# EAGLE board ATTiny10ProgrammingAdapter (EAGLE 6.4)
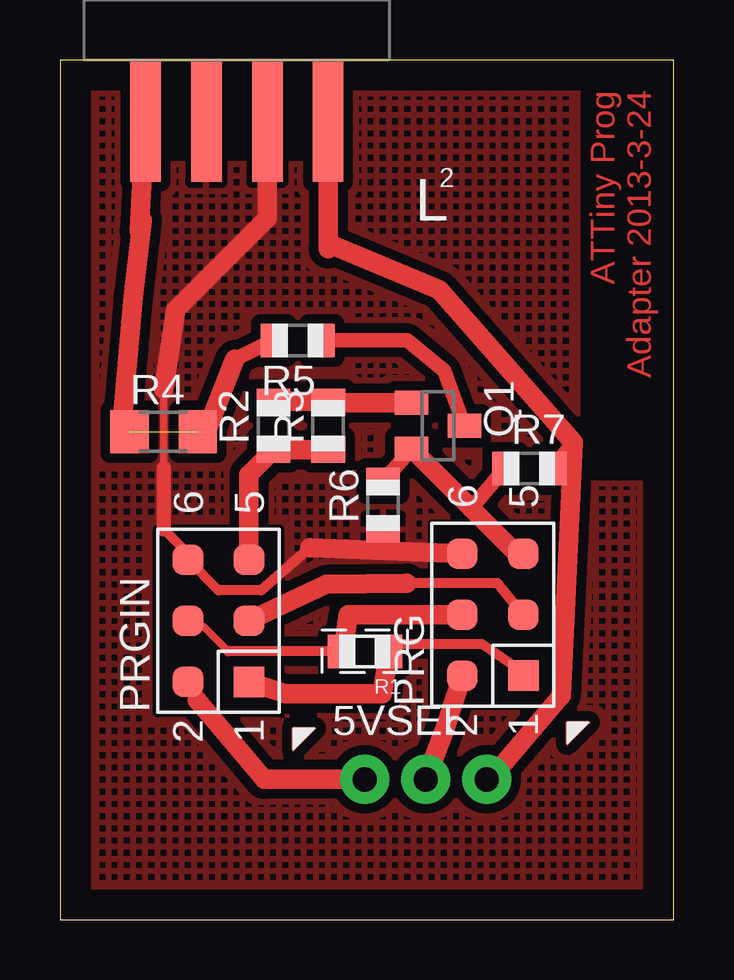
[diagram p0: board, top side]
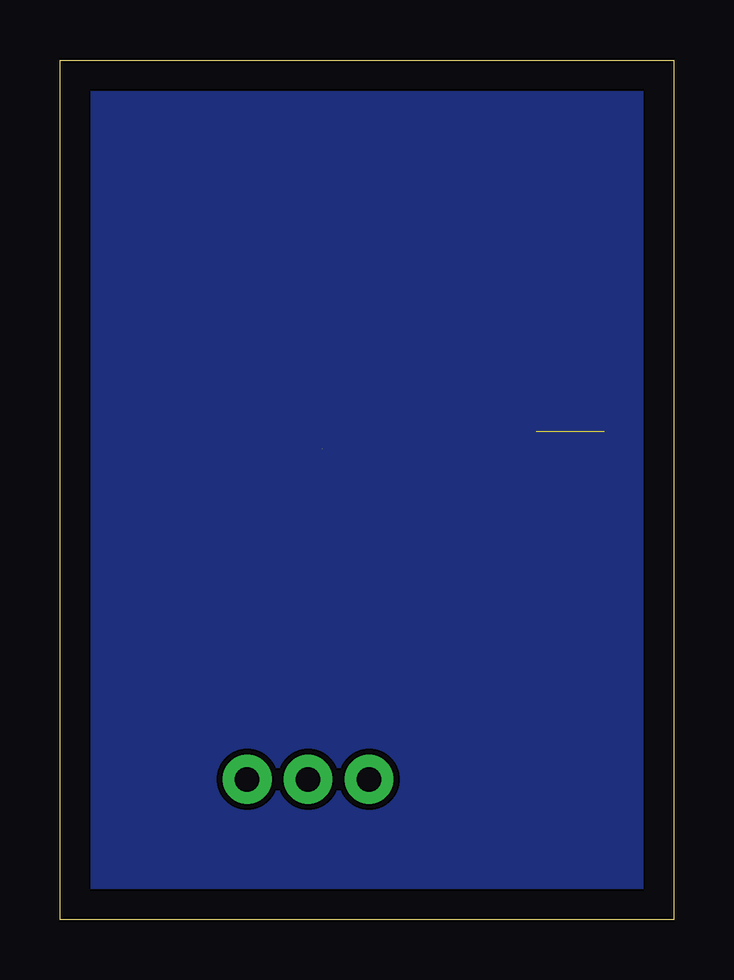
[diagram p1: board, bottom side, seen from below]

Size 25.58 x 35.8 mm. Coordinates in mm from the lower left corner, seen from the top.
Outline: 0,0 25.58,0 25.58,35.8 0,35.8 0,0
Copper layers (1*16): Top 0.0356mm / dielectric 1.5011mm / Bottom 0.0356mm
Design rules "ll-etch-lax": minimum track width 8mil, minimum drill 21mil, track to track 8mil, track to pad 7mil, pad to pad 12mil, via to via 20mil, smd to smd 4mil, copper to edge 50mil, drill to drill 30mil, minimum pad ring 20mil, minimum via ring 18mil, stop-mask expansion 0mil, vias tented up to drill 20mil, thermal gap 10mil

## Footprints (pad centres in the part's own frame; a part is rotated, then mirrored left to right if it is on the bottom)
1X03-CLEANBIG = drill 1.016 pad 1.676: 1 -2.54,0; 2 0,0; 3 2.54,0
1X04-SMD-LONG = smd 1.27 x 5.08: 1 -3.81,0; 2 -1.27,0; 3 1.27,0; 4 3.81,0
HEADER_PRG_2X03_ETCH = smd 1.27 x 1.27: 1 -2.54,-1.27; 2 -2.54,1.27; 3 0,-1.27; 4 0,1.27; 5 2.54,-1.27; 6 2.54,1.27
SOT23 = smd 1 x 1.4: 1 -0.95,-1.1; 2 0.95,-1.1; 3 0,1.1
R0805 = smd 1.1 x 1.4: 1 -1,0; 2 1,0
R1206 = smd 1.6 x 1.803: 1 -1.422,0; 2 1.422,0

## Placement (x,y rotation side)
5VSEL  [1X03-CLEANBIG]  15.24,5.84 0 top
EXTPOWER  [1X04-SMD-LONG]  7.37,33.27 180 top
PRG  CON_HEADER_PRG_AVR_ICSP_ETCH  [HEADER_PRG_2X03_ETCH]  18.03,12.7 90 top
PRGIN  CON_HEADER_PRG_AVR_ICSP_ETCH  [HEADER_PRG_2X03_ETCH]  6.6,12.45 90 top
Q1  [SOT23]  15.75,20.57 270 top
R1  1K  [R0805]  12.7,11.18 180 top
R2  BLANK  [R0805]  8.89,20.57 90 top
R3  1k  [R0805]  11.18,20.57 90 top
R4  0  [R1206]  4.32,20.32 0 top
R5  50k  [R0805]  9.91,24.13 180 top
R6  2k  [R0805]  13.46,17.27 90 top
R7  2k  [R0805]  19.56,18.8 0 top
U$1  [L2LOGO]  15.49,29.72 0 top

## Library data of the parts
5VSEL R2 R3 R5-R7 = adafruit
EXTPOWER PRG PRGIN R1 R4 U$1 = LL
Q1 = semicon-smd-ipc

## Nets
+5V: 5VSEL.2 PRG.2
+12V: EXTPOWER.4 R4.1 R4.2 R5.2
GND: EXTPOWER.2 EXTPOWER.3 PRG.6 PRGIN.6 R6.1
MOSI: PRG.4 PRGIN.4 R1.2
N$1: Q1.1 R2.2 R3.2
N$4: Q1.3 R5.1
PRGRST: PRGIN.5 R2.1 R3.1
RST: PRG.5 Q1.2 R6.2 R7.1
TPICLK: PRG.3 PRGIN.3
TPIDATA: PRG.1 PRGIN.1 R1.1
V+: 5VSEL.1 PRGIN.2
VDD: 5VSEL.3 EXTPOWER.1 R7.2

## Tracks (layer width: path | path; a pad name or v marks a point on that pad's centre or on a via)
+5V
  Top 0.813: PRG.2 16,7.87 5VSEL.2
+12V  (1 unrouted)
  Top 0.254: 2.54,20.07 2.79,20.32 | 3.43,29.13 3.3,28.7
  Top 0.406: 2.79,20.32 R4.1 | 6.1,20.32 R4.2
  Top 0.61: R5.2 7.29,23.34
  Top 0.813: EXTPOWER.4 3.3,28.7 | 3.43,29.13 3.05,25.96 2.54,20.07 | 6.1,20.32 7.29,23.34
GND
  Top 0.305: PRGIN.6 5.33,15.24 | 4.32,18.8 4.32,22.1
  Top 0.406: 10.41,15.49 8.38,13.72 6.6,13.72 PRGIN.6 | 5.33,15.24 4.32,16.26
  Top 0.61: 4.32,16.26 4.32,18.8
  Top 0.813: PRG.6 10.41,15.49 | 4.32,22.1 4.83,25.4 8.64,29.21 EXTPOWER.2
  pour Top (isolate 0.406, rank 3, hatched): 1.27,1.02 25.65,1.27 25.65,35.81 1.27,35.81
  pour Bottom (isolate 0.254, rank 2): 1.27,1.02 25.15,0.76 24.64,36.58 1.27,36.07
MOSI
  Top 0.254: 5.99,12.19 PRGIN.4 | 11.81,11.23 R1.2
  Top 0.305: 7.01,11.18 5.99,12.19
  Top 0.406: R1.2 7.01,11.18
  Top 0.813: PRG.4 12.01,12.7 11.81,11.23
N$1
  Top 0.254: 8.89,21.59 R2.2 | 11.18,21.59 R3.2 11.28,21.54 | 14.63,21.54 Q1.1
  Top 0.813: 11.18,21.59 8.89,21.59 | 11.28,21.54 14.63,21.54
N$2
  cutout Top: 4.06,16.26 9.14,16.26 9.14,8.64 4.06,8.64
N$3
  cutout Top: 15.49,16.51 15.49,8.89 20.57,8.89 20.57,16.51
N$4
  Top 0.61: Q1.3 16,22.86 14.48,24.13 R5.1
PRGRST
  Top 0.254: 8.89,19.56 R2.1 8.99,19.58 | 11.18,19.58 R3.1
  Top 0.813: PRGIN.5 7.87,18.54 8.89,19.56 | 8.99,19.58 11.18,19.58
RST  (1 unrouted)
  Top 0.254: 19.02,15.24 PRG.5
  Top 0.61: Q1.2 R6.2 | R7.1 17.13,17.13
  Top 0.813: Q1.2 17.13,17.13 19.02,15.24
TPICLK
  Top 0.406: 14.45,14.02 18.24,14.02 PRG.3
  Top 0.813: PRGIN.3 11.1,13.97 14.45,14.02
TPIDATA
  Top 0.254: R1.1 14.33,11.48 | 19.15,10.41 PRG.1
  Top 0.406: 19.15,10.41 17.58,11.48 14.33,11.48
  Top 0.813: PRGIN.1 9.4,9.4 13.44,9.4 R1.1
V+
  Top 0.254: 5.71,9.14 PRGIN.2
  Top 0.813: 5.71,9.14 8.51,5.84 5VSEL.1
VDD
  Top 0.254: 18.03,5.97 5VSEL.3
  Top 0.61: 11.56,28.02 11.18,27.94 | 21.39,19.89 R7.2
  Top 0.813: EXTPOWER.1 11.18,27.94 | 18.03,5.97 20.88,9.32 21.39,19.89 15.8,26.24 11.56,28.02

## Text on the board
Top: ATTiny Prog / Adapter 2013-3-24